# Altium PCB 双电机驱动.PcbDoc
Units mm, origin at the board's own origin, x right, y up, seen from the top; angles counter-clockwise.
Board outline 71.5 x 40.39 mm, 2 copper layers (Top Layer, Bottom Layer); 42 components, 29 nets, 112 pads, 72 vias.
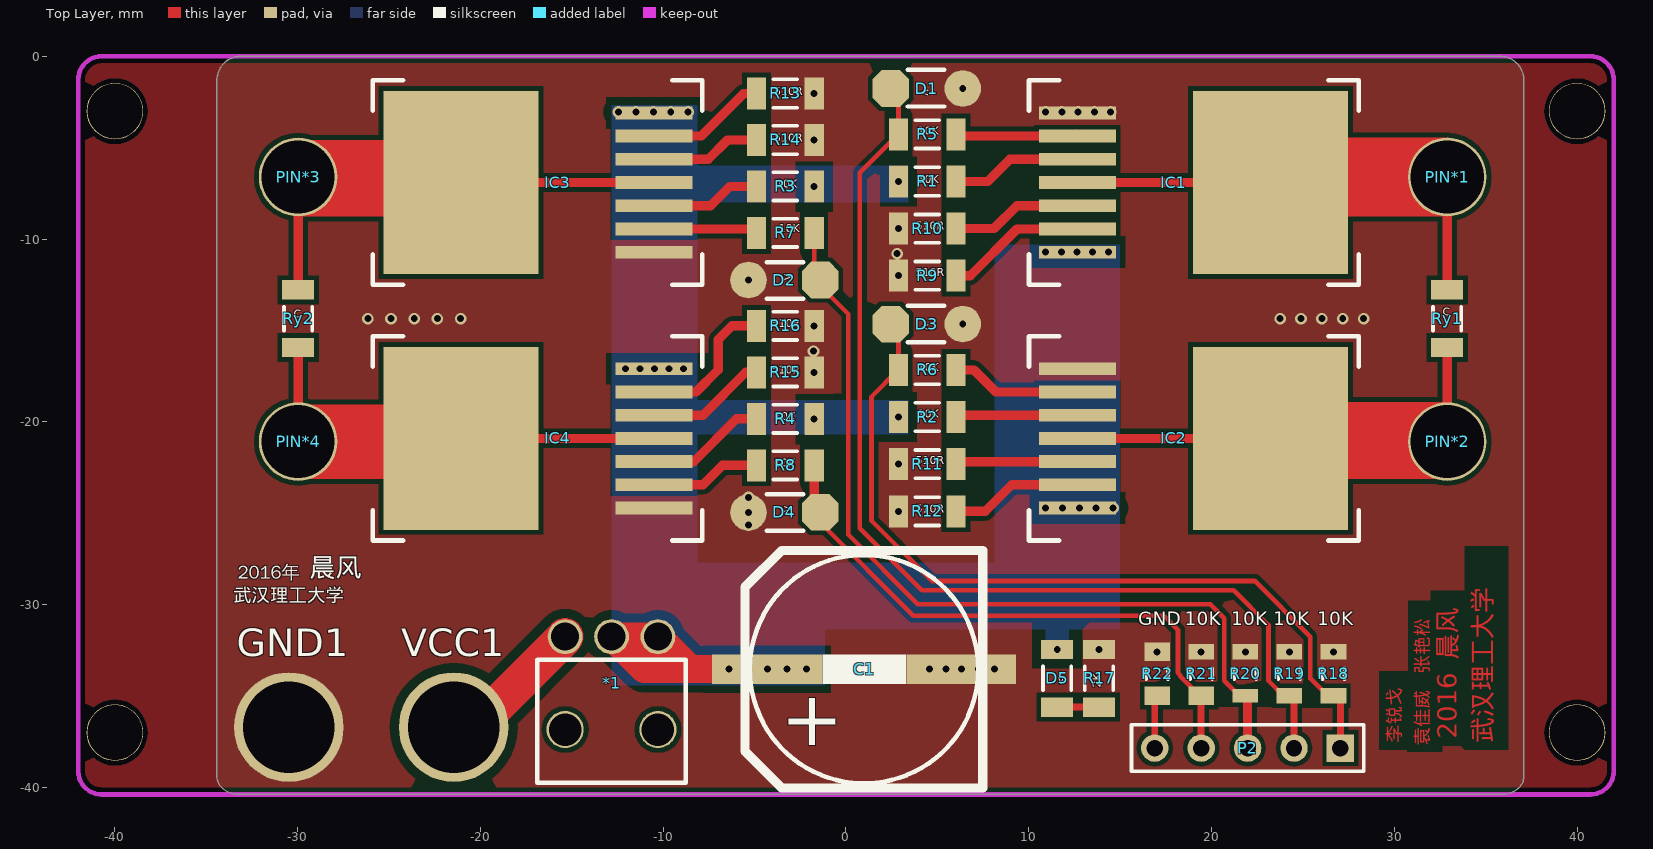
[diagram p0: Top Layer view]
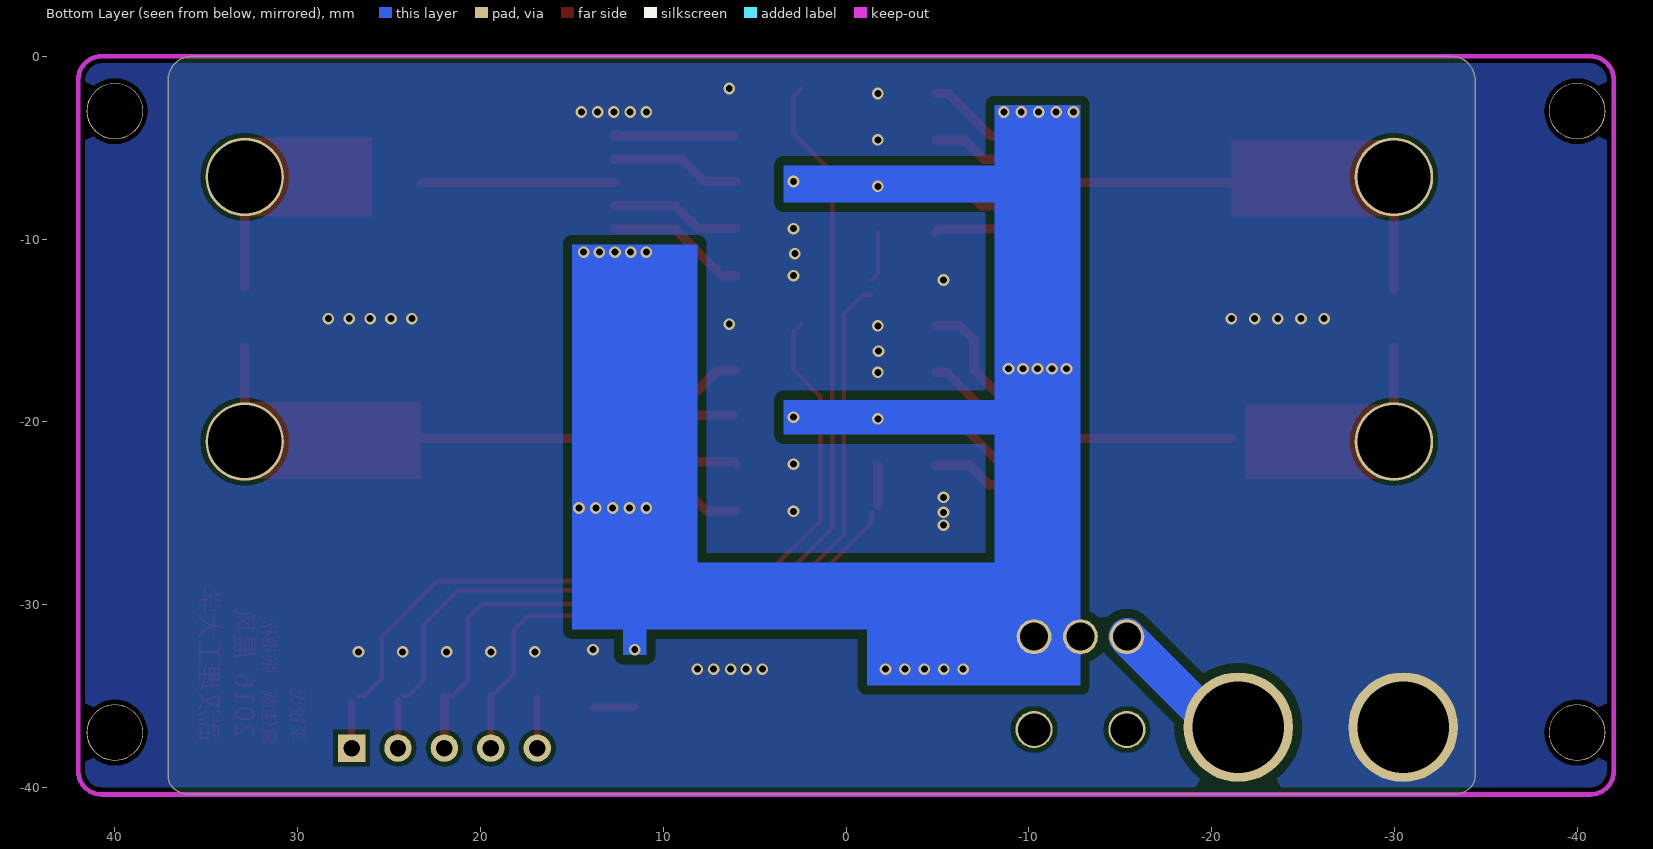
[diagram p1: Bottom Layer view, seen from below]

## Layer stack, top to bottom
Top Layer: signal copper 0.0356
Dielectric: dielectric 0.32, FR-4, Dk 4.8
Bottom Layer: signal copper 0.0356

## Board outline
-34.163,-40.005 cw(c-33.55,-39.392) -34.417,-39.392 -34.417,-1.301 cw(c-33.116,-1.301) -34.036,-0.381 cw(c-33.116,-1.301) -33.116,0 35.783,0 cw(c35.783,-1.301) 36.703,-0.381 cw(c35.783,-1.301) 37.084,-1.301 37.084,-39.392 cw(c36.217,-39.392) 36.83,-40.005 cw(c35.91,-39.085) 35.91,-40.386 -33.243,-40.386 cw(c-33.243,-39.085)

## Design rules (kind name [scope] priority, off if disabled: settings)
Clearance Clearance_1 [InNet('EGND') vs InNet('VCCIN')] p1: gap=0.508
Clearance [InNet('EGND') vs InNet('VCC')] p2: gap=0.508
Clearance Clearance_3 [All] p3: gap=0.254
PlaneConnect [All] p1: planeconnectstyle=Direct reliefexpansion=0.508 reliefentries=4 reliefconductorwidth=0.254 reliefairgap=0.254
PolygonConnect [All] p1: connectstyle=Direct reliefconductorwidth=0.254 reliefentries=4 polygonreliefangle="90 Angle" airgapwidth=0.254
RoutingVias [All] p1: holewidth=0.711 width=1.27 viastyle="Through Hole" minholewidth=0.711 minwidth=1.27 maxholewidth=0.711 maxwidth=1.27
SolderMaskExpansion [All] p1: expansion=0.102
Width [All] p1: maxlimit=2.032 minlimit=0.152 preferedwidth=0.508 minimp=50.000000 maximp=50.000000 favimp=50.000000
27 further rules are at their usual default settings.

## Components (designator, comment, footprint, x,y, rotation, side; value= is the part's Value field where it differs from the comment)
*1 "small switch" "small switch" -10.287,-31.75 r270 top
C1 "330uF" SMD-EC-F12.5 -4.318,-33.528 r0 top
D1 "1SS355" "hole-chip diode" 6.388,-0.745 r180 top
D2 "1SS355" "hole-chip diode" -5.334,-13.255 r0 top
D3 "1SS355" "hole-chip diode" 6.388,-13.634 r180 top
D4 "1SS355" "hole-chip diode" -5.334,-25.968 r0 top
D5 "LED" 1206(2) 11.557,-34.036 r270 top
GND1 "PIN" PIN#1 -30.48,-36.703 r0 top
IC1 "BTN7960" PG-TO263-7-1 11.539,-6.904 r270 top
IC2 "BTN7960" PG-TO263-7-1 11.539,-20.904 r270 top
IC3 "BTN7960" PG-TO263-7-1 -9.38,-6.904 r90 top
IC4 "BTN7960" PG-TO263-7-1 -9.38,-20.904 r90 top
P2 "Header 5" HDR1X5 27.051,-37.846 r180 top
PIN*1 "PIN" PIN#2 32.893,-6.604 r0 top
PIN*2 "PIN" PIN#2 32.893,-21.082 r0 top
PIN*3 "PIN" PIN#2 -29.972,-6.604 r0 top
PIN*4 "PIN" PIN#2 -29.972,-21.082 r0 top
R1 "Res2" 1206(2) 4.445,-6.848 r180 top
R2 "Res2" 1206(2) 4.445,-19.737 r0 top
R3 "Res2" 1206(2) -3.317,-7.117 r0 top
R4 "Res2" 1206(2) -3.317,-19.831 r180 top
R5 "Res2" 1206(2) 4.445,-4.27 r0 top
R6 "Res2" 1206(2) 4.445,-17.159 r180 top
R7 "Res2" 1206(2) -3.317,-9.66 r180 top
R8 "Res2" 1206(2) -3.317,-22.373 r0 top
R9 "Res2" 1206(2) 4.445,-12.003 r0 top
R10 "Res2" 1206(2) 4.445,-9.426 r0 top
R11 "Res2" 1206(2) 4.445,-22.314 r0 top
R12 "Res2" 1206(2) 4.445,-24.892 r0 top
R13 "Res2" 1206(2) -3.317,-2.032 r180 top
R14 "Res2" 1206(2) -3.317,-4.575 r180 top
R15 "Res2" 1206(2) -3.317,-17.288 r180 top
R16 "Res2" 1206(2) -3.317,-14.745 r180 top
R17 "10K" 1206(2) 13.843,-34.036 r270 top
R18 "Res2" R2012#1 26.67,-33.782 r90 top
R19 "Res2" R2012#1 24.257,-33.782 r90 top
R20 "Res2" R2012#2 21.844,-33.782 r90 top
R21 "Res2" R2012#3 19.431,-33.782 r90 top
R22 "Res2" R2012#4 17.018,-33.782 r90 top
Ry1 "" 1206(2) 32.893,-14.351 r270 top
Ry2 "" 1206(2) -29.972,-14.351 r270 top
VCC1 "PIN" PIN#1 -21.463,-36.703 r0 top

## Footprints (in the part's own frame and the unit in brackets; to place one, negate y for a bottom-side part, rotate by r counter-clockwise, add the part's x,y. Pads: shape width x height; smd on the part's side, far side on the other; paste and mask are expansions set on the pad)
1206(2) [mm]
  rect 1.05x1.75 smd: 1(-1.575,0) 2(1.575,0)
  silkscreen extent -0.65,-0.77 0.65,0.77, body extent -1.6,-0.8 1.6,0.8, height 1.6
HDR1X5 [mm] "Connector; Header; 5 Position"
  rect 1.5x1.5 hole 0.9: 1(0,0)
  round 1.5 hole 0.9: 2(2.54,0) 3(5.08,0) 4(7.62,0) 5(10.16,0)
  silkscreen extent -1.27,-1.27 11.43,1.27, body extent -1.27,-1.27 11.43,1.27, height 7.58
"hole-chip diode" [mm]
  round 2 smd: 1(0,1.016)
  oct 2x2 smd: 2(3.937,1.016)
  silkscreen extent 1,0 3,2
PG-TO263-7-1 [mm]
  rect 0.7x4.2 smd: 1(-3.81,1.123) 2(-2.54,1.123) 3(-1.27,1.123) 4(0,1.123) 5(1.27,1.123) 6(2.54,1.123) 7(3.81,1.123)
  rect 10x8.5 smd: 8(0,11.684)
  silkscreen extent -5.59,-1.52 5.59,16.51
PIN#1 [mm]
  round 6 hole 5: 1(0,0)
PIN#2 [mm]
  round 4.3 hole 4: 1(0,0)
R2012#1 [mm] "Chip Resistor, 2-Leads, Body 2.0x1.2mm, IPC Low Density"
  rect 0.864x1.4 smd: 1(-1.2,0) 2(1.2,0)
  silkscreen extent -0.3,-0.6 0.3,0.6, body extent -0.98,-0.6 1.02,0.6, height 0.5
R2012#2 [mm] "Chip Resistor, 2-Leads, Body 2.0x1.2mm, IPC Low Density"
  rect 0.762x1.4 smd: 1(-1.2,0)
  rect 0.864x1.4 smd: 2(1.2,0)
  silkscreen extent -0.3,-0.6 0.3,0.6, body extent -0.98,-0.6 1.02,0.6, height 0.5
R2012#3 [mm] "Chip Resistor, 2-Leads, Body 2.0x1.2mm, IPC Low Density"
  rect 1x1.4 smd: 1(-1.2,0)
  rect 0.864x1.4 smd: 2(1.2,0)
  silkscreen extent -0.3,-0.6 0.3,0.6, body extent -0.98,-0.6 1.02,0.6, height 0.5
R2012#4 [mm] "Chip Resistor, 2-Leads, Body 2.0x1.2mm, IPC Low Density"
  rect 1x1.4 smd: 1(-1.2,0) 2(1.2,0)
  silkscreen extent -0.3,-0.6 0.3,0.6, body extent -0.98,-0.6 1.02,0.6, height 0.5
"small switch" [mil]
  round 80 hole 70: 0(200,0) 0(200,-200)
  round 75 hole 60: 1(0,0) 2(0,-100) 3(0,-200)
  silkscreen extent 50,-260 315,60
SMD-EC-F12.5 [mm]
  rect 6x1.6 smd: 1(0,0) 2(10.625,0)
  silkscreen extent -1.2,-6.5 11.8,6.49

## Part data
C1: library part "Cap Pol1", "Polarized Capacitor (Radial)"
D1 D2 D3 D4: library part "Diode 1N4148", "High Conductance Fast Diode"
D5: "Typical INFRARED GaAs LED"
P2: "Header, 5-Pin"
R1 R2 R3 R4 R5 R6 R7 R8 R9 R10 R11 R12 R13 R14 R15 R16 R18 R19 R20 R21 R22: "Resistor"
R17 Ry1 Ry2: library part Res, "Resistor"

## Free pads (board coordinates)
  round 3.1 hole 3: 0(-40,-3) 1(-40,-37) 2(40,-3) 3(40,-37)

## Via types
v1: diameter 0.635, hole 0.381, Top Layer to Bottom Layer, 72 vias

## Nets (pads, with @x,y where several pads share a name; then routed paths per layer and width w, separated by ;. In a path a pad name is that pad's centre, name@x,y a point inside that pad or via, vN(x,y) a via of type N, cw(c..) or ccw(c..) an arc to the next point about the centre after c; other vN are vias at no path point)
EGND: C1.2 D1.1 D2.1 D3.1 D4.1 GND1.1 IC1.1 IC2.1 IC3.1 IC4.1 R9.1 R10.1 R11.1 R12.1 R13.1 R14.1 R15.1 R16.1 R17.1 R18.2 R19.2 R20.2 R21.2 R22.2
  other v1: 4.572,-33.528 5.461,-33.528 6.307,-33.528 7.239,-33.528 8.128,-33.528 17.018,-32.582 19.431,-32.582 21.844,-32.582 24.257,-32.582 26.67,-32.582 13.843,-32.461 -5.334,-25.654 -5.334,-24.952 2.87,-24.892 -5.334,-24.13 2.87,-22.314 -1.742,-17.288 -1.778,-16.129 -1.742,-14.745 6.388,-14.65 -26.162,-14.351 -24.892,-14.351 -23.622,-14.351 -22.352,-14.351 -21.082,-14.351 23.749,-14.351 24.892,-14.351 26.035,-14.351 27.178,-14.351 28.321,-14.351 -5.334,-12.239 2.87,-12.003 2.794,-10.795 2.87,-9.426 -1.742,-4.575 10.922,-3.048 11.811,-3.048 12.7,-3.048 13.589,-3.048 14.478,-3.048 -1.742,-2.032 6.388,-1.761
MOTTO_IN1: D3.2 P2.1 R6.2 R18.1 | length 44.6
  Top Layer w0.254: D3.2 2.87,-15.069 R6.2 1.397,-18.632 1.397,-25.4 4.699,-28.702 22.352,-28.702 25.4,-31.75 25.4,-34.036 26.346,-34.982 R18.1
  Top Layer w0.381: P2.1 R18.1@27.051,-35.363
MOTTO_IN2: D1.2 P2.2 R5.1 R19.1 | length 56.8
  Top Layer w0.254: D1.2 2.87,-2.18 R5.1 0.762,-6.378 0.762,-25.818 4.154,-29.21 21.209,-29.21 23.114,-31.115 23.114,-34.163 23.933,-34.982 R19.1
  Top Layer w0.381: P2.2 R19.1@24.511,-35.236
MOTTO_IN3: D2.2 P2.3 R7.1 R20.1 | length 46.9
  Top Layer w0.254: R7.1 -1.742,-11.894 D2.2 ; D2.2@-1.397,-13.03 -0.94,-13.03 0.127,-14.097 0.127,-26.162 3.937,-29.972 19.939,-29.972 20.701,-30.734 20.701,-34.163 21.52,-34.982 R20.1
  Top Layer w0.508: P2.3 R20.1@21.971,-35.109
MOTTO_IN4: D4.2 P2.4 R8.2 R21.1 | length 31.8
  Top Layer w0.254: D4.2 -1.397,-25.527 3.683,-30.607 17.399,-30.607 18.161,-31.369 18.161,-33.712 18.288,-33.909 R21.1@19.396,-35.017
  Top Layer w0.381: P2.4 R21.1
  Top Layer w0.508: D4.2@-1.742,-24.607 R8.2
NetD5_2: D5.2 R17.2 | length 2.3
  Top Layer w0.381: D5.2 R17.2
NetIC1_2: IC1.2 R5.2 | length 6.7
  Top Layer w0.508: R5.2@6.114,-4.364 IC1.2 IC1.2@12.568,-4.27
NetIC1_3: IC1.3 R1.1 | length 7.1
  Top Layer w0.508: R1.1 7.757,-6.848 8.971,-5.634 IC1.3
NetIC1_5: IC1.5 R10.2 | length 7.2
  Top Layer w0.508: R10.2 8.1,-9.426 9.352,-8.174 IC1.5
NetIC1_6: IC1.6 R9.2 | length 7.7
  Top Layer w0.508: R9.2 6.793,-12.003 9.352,-9.444 IC1.6
NetIC2_2: IC2.2 R6.1 | length 7.1
  Top Layer w0.508: R6.1 6.999,-17.159 8.204,-18.364 IC2.2
NetIC2_3: IC2.3 R2.2 | length 6.5
  Top Layer w0.508: R2.2@6.123,-19.634 IC2.3
NetIC2_5: IC2.5 R11.2 | length 6.7
  Top Layer w0.508: R11.2 6.16,-22.174 IC2.5
NetIC2_6: IC2.6 R12.2 | length 7.2
  Top Layer w0.508: R12.2 7.62,-24.892 9.068,-23.444 IC2.6
NetIC3_2: IC3.2 R7.2 | length 5.7
  Top Layer w0.508: IC3.2 -5.108,-9.444 R7.2
NetIC3_3: IC3.3 R3.1 | length 6
  Top Layer w0.508: IC3.3 -7.412,-8.174 -6.355,-7.117 R3.1
NetIC3_5: IC3.5 R14.2 | length 6
  Top Layer w0.508: IC3.5 -7.539,-5.634 -6.48,-4.575 R14.2
NetIC3_6: IC3.6 R13.2 | length 6.6
  Top Layer w0.508: IC3.6 -7.92,-4.364 -5.588,-2.032 R13.2
NetIC4_2: IC4.2 R8.1 | length 6.1
  Top Layer w0.508: IC4.2 -7.823,-23.444 -6.752,-22.373 R8.1
NetIC4_3: IC4.3 R4.2 | length 6.6
  Top Layer w0.508: IC4.3 -8.331,-22.174 -5.988,-19.831 R4.2
NetIC4_5: IC4.5 R15.2 | length 6.6
  Top Layer w0.508: IC4.5 -7.823,-19.634 -5.477,-17.288 R15.2
NetIC4_6: IC4.6 R16.2 | length 8.1
  Top Layer w0.508: IC4.6 -8.204,-18.364 -6.985,-17.145 -6.985,-15.494 -6.236,-14.745 R16.2
NetP2_5: P2.5 R22.1 | length 2.7
  Top Layer w0.381: P2.5 R22.1@16.891,-35.109
OUT1: IC1.4 IC1.8 PIN*1.1 Ry1.1 | length 16.6
  Top Layer w0.508: IC1.4 IC1.8 ; Ry1.1@32.893,-12.649 PIN*1.1
OUT2: IC2.4 IC2.8 PIN*2.1 Ry1.2 | length 15.7
  Top Layer w0.508: IC2.4 IC2.8 ; PIN*2.1 Ry1.2
OUT3: IC3.4 IC3.8 PIN*3.1 Ry2.1 | length 16.7
  Top Layer w0.508: Ry2.1 PIN*3.1 ; IC3.8 IC3.4
OUT4: IC4.4 IC4.8 PIN*4.1 Ry2.2 | length 15.7
  Top Layer w0.508: PIN*4.1 Ry2.2 ; IC4.8 IC4.4
VCC: *1.1 *1.2 C1.1 D5.1 IC1.7 IC2.7 IC3.7 IC4.7 R1.2 R2.1 R3.2 R4.1 | length 15.3
  Top Layer w1.524: -10.287,-32.766 *1.1 ; C1.1 -8.509,-33.528 ; *1.1 *1.2 -11.049,-33.528 -8.509,-33.528 ; *1.1 -8.509,-33.528
  other v1: -6.413,-33.528 -5.35,-33.528 -4.286,-33.528 -3.223,-33.528 -2.159,-33.528 11.557,-32.461 10.922,-24.714 11.843,-24.714 12.763,-24.714 13.684,-24.714 14.605,-24.714 -1.742,-19.831 2.87,-19.737 -12.065,-17.094 -11.271,-17.094 -10.477,-17.094 -9.684,-17.094 -8.89,-17.094 10.922,-10.714 11.779,-10.714 12.636,-10.714 13.494,-10.714 14.351,-10.714 -1.742,-7.117 2.87,-6.848 -12.446,-3.048 -11.493,-3.048 -10.541,-3.048 -9.588,-3.048 -8.636,-3.048
VCCIN: *1.3 VCC1.1 | length 16.3
  Top Layer w2.032: VCC1.1 -20.32,-36.703 *1.3
  Bottom Layer w2.032: VCC1.1 -20.32,-36.703 *1.3
pads on no net: *1.0

## Polygon pours and split planes (outlines as drawn)
EGND on Top Layer "Top Layer-GND" (solid, remove dead copper, pour order 2): 42,-40.386 42,-35.56 42,0 35.871,0 -42.164,0 -42.164,-31.115 -42.164,-40.386 -36.334,-40.386
EGND on Bottom Layer "Top Layer-GND" (solid, remove dead copper, pour order 4): -42.164,-36.576 -42.164,-40.386 -38.576,-40.386 42,-40.386 42,-28.575 42,0 21.221,0 -42.164,0 -42.164,-3.556

## Keep-outs
Keep-Out Layer:
  lines w0.245: -42,-38.862 -42,-1.778 ; 42,-38.989 42,-1.651
  lines w0.254: -42,-38.862 -42,-39.116 ccw(c-40.73,-39.116) -40.73,-40.386 35.052,-40.386 40.73,-40.386 ccw(c40.73,-39.116) 42,-39.116 42,-38.989 ; -42,-1.778 -42,-1.27 cw(c-40.73,-1.27) -40.73,0 -32.639,0 34.798,0 40.73,0 cw(c40.73,-1.27) 42,-1.27 42,-1.651

## Other copper
Top Layer:
  rectangle net OUT3: -30.099,-8.763 -21.082,-4.572
  rectangle net OUT4: -29.972,-23.114 -21.844,-19.05
  rectangle net OUT1: 25.908,-8.763 33.02,-4.445
  rectangle net OUT2: 23.241,-23.114 32.893,-18.923
  text "晨风" at 33.782,-33.02 h1.78 r90
  text "张艳松" at 32.131,-33.782 h1.27 r90
  text "2016" at 33.782,-37.338 h1.78 r90.25
  text "李锐戈" at 30.607,-37.592 h1.27 r90
  text "武汉理工大学" at 35.687,-37.592 h1.78 r90
  text "袁佳威" at 32.131,-37.719 h1.27 r90
Bottom Layer:
  rectangle net VCC: -12.827,-34.417 -1.143,-27.686
  rectangle net VCC: -12.827,-29.464 -8.128,-2.667
  rectangle net VCC: -6.604,-31.369 14.986,-27.686
  rectangle net VCC: 8.128,-29.083 14.986,-10.287
  rectangle net VCC: -9.652,-20.701 3.429,-18.796
  rectangle net VCC: -8.509,-8.001 3.429,-5.969
  rectangle net VCC: 10.922,-32.766 12.192,-30.734

## Silkscreen, mask and mechanical layers (free items; w line width, h text height)
Top Overlay:
  text ">" at 4.572,-1.651 h0.76 r180
  text "510R" at -3.937,-2.286 h0.76
  text "10K" at 3.937,-4.445 h0.76
  text "510R" at -3.937,-4.826 h0.76
  text "10K" at 3.937,-7.112 h0.76
  text "10K" at -3.81,-7.366 h0.76
  text "510R" at 3.81,-9.652 h0.76
  text "10K" at -3.683,-9.779 h0.76
  text "510R" at 3.81,-12.192 h0.76
  text ">" at -3.429,-12.446 h0.76
  text "C" at 32.639,-14.351 h0.76
  text "C" at -30.226,-14.478 h0.76
  text ">" at 4.572,-14.478 h0.76 r180
  text "510R" at -4.064,-14.986 h0.76
  text "10K" at 3.937,-17.399 h0.76
  text "510R" at -4.064,-17.526 h0.76
  text "10K" at 3.937,-19.939 h0.76
  text "10K" at -3.937,-20.066 h0.76
  text "510R" at 3.81,-22.479 h0.76
  text "10K" at -3.937,-22.606 h0.76
  text ">" at -3.429,-25.146 h0.76
  text "510R" at 3.81,-25.146 h0.76
  text "2016年" at -33.274,-28.829 h1.27
  text "晨风" at -29.337,-28.829 h1.78
  text "武汉理工大学" at -33.528,-30.099 h1.27
  text "GND" at 16.002,-31.369 h1.27
  text "10K" at 18.542,-31.369 h1.27
  text "10K" at 21.082,-31.369 h1.27
  text "10K" at 23.368,-31.369 h1.27
  text "10K" at 25.781,-31.369 h1.27
  text ">" at 11.43,-33.909 h0.76 r270
  text "2K" at 14.097,-34.544 h0.76 r90

## Text inside footprints (layer, text, board x,y; h text height)
C1: Top Overlay "+" at -3.568,-37.696 h3